# Altium PCB MAINSSMB V1.4 .PcbDoc (part 1 of 2)
Units mm, origin at the board's own origin, x right, y up, seen from the top; angles counter-clockwise.
Board outline 44.25 x 69.93 mm, 2 copper layers (Top Layer, Bottom Layer), stack 1.671 mm thick; 41 components, 30 nets, 189 pads, 20 vias.
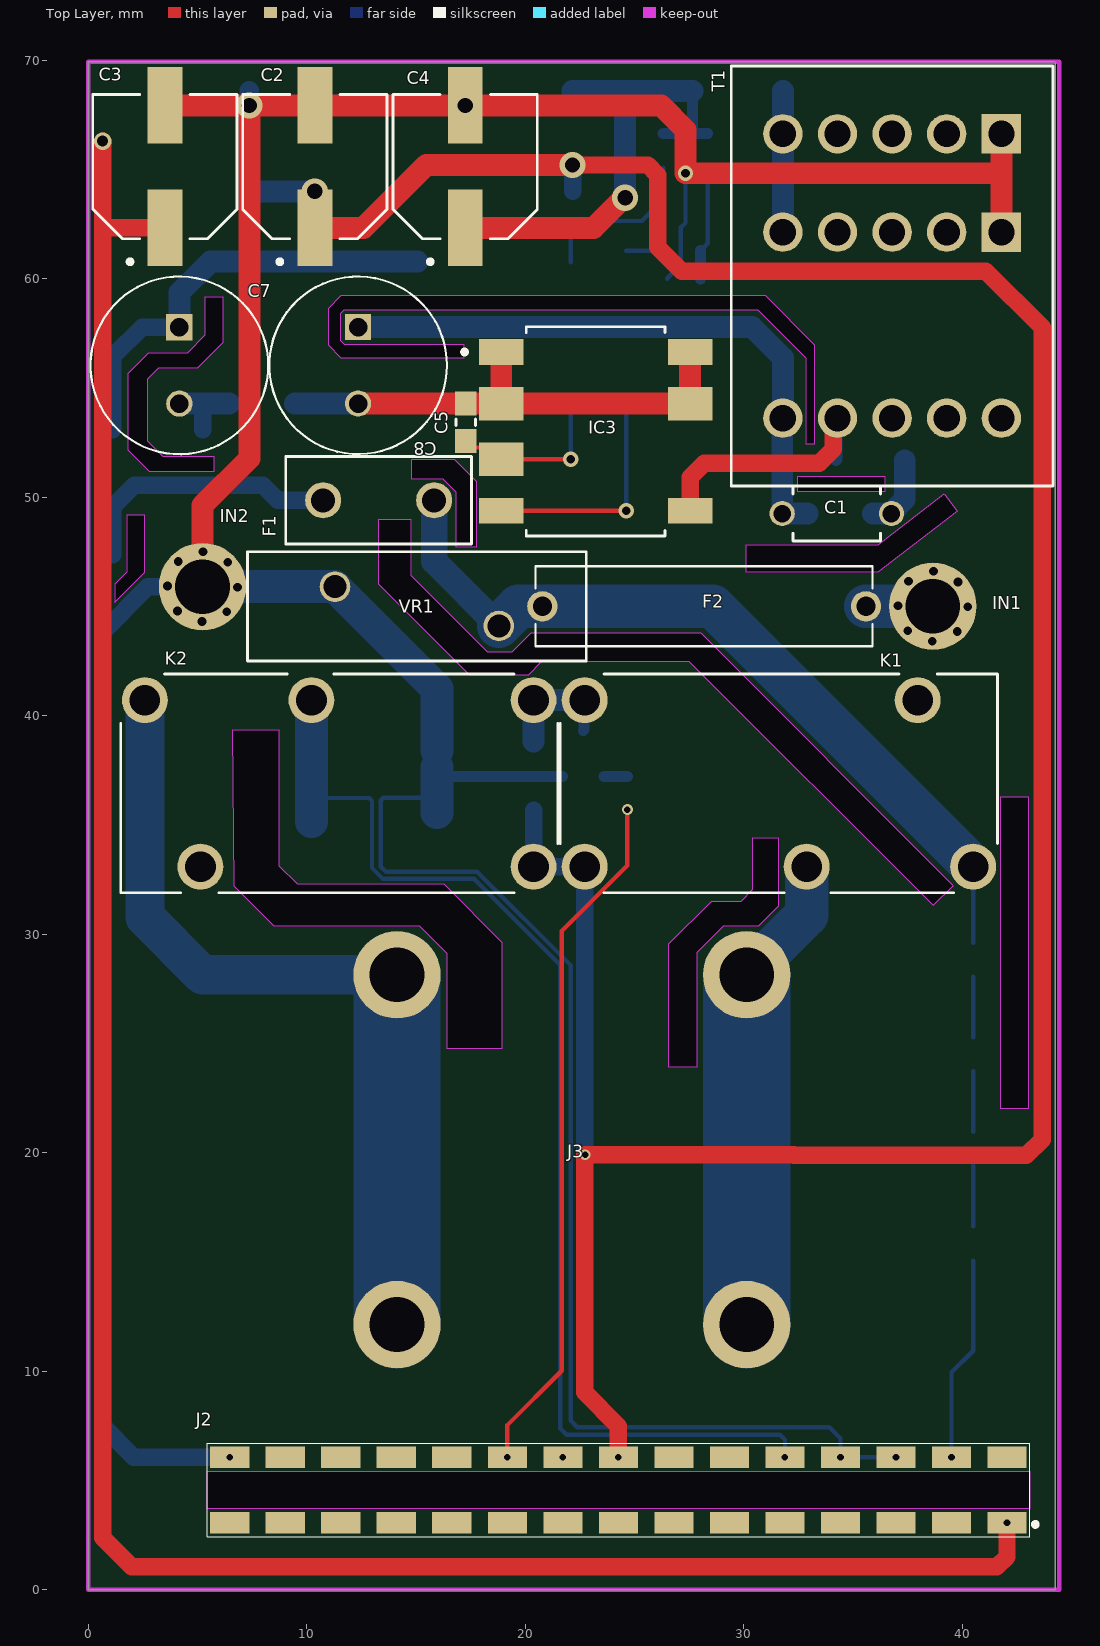
[diagram p0: Top Layer view]
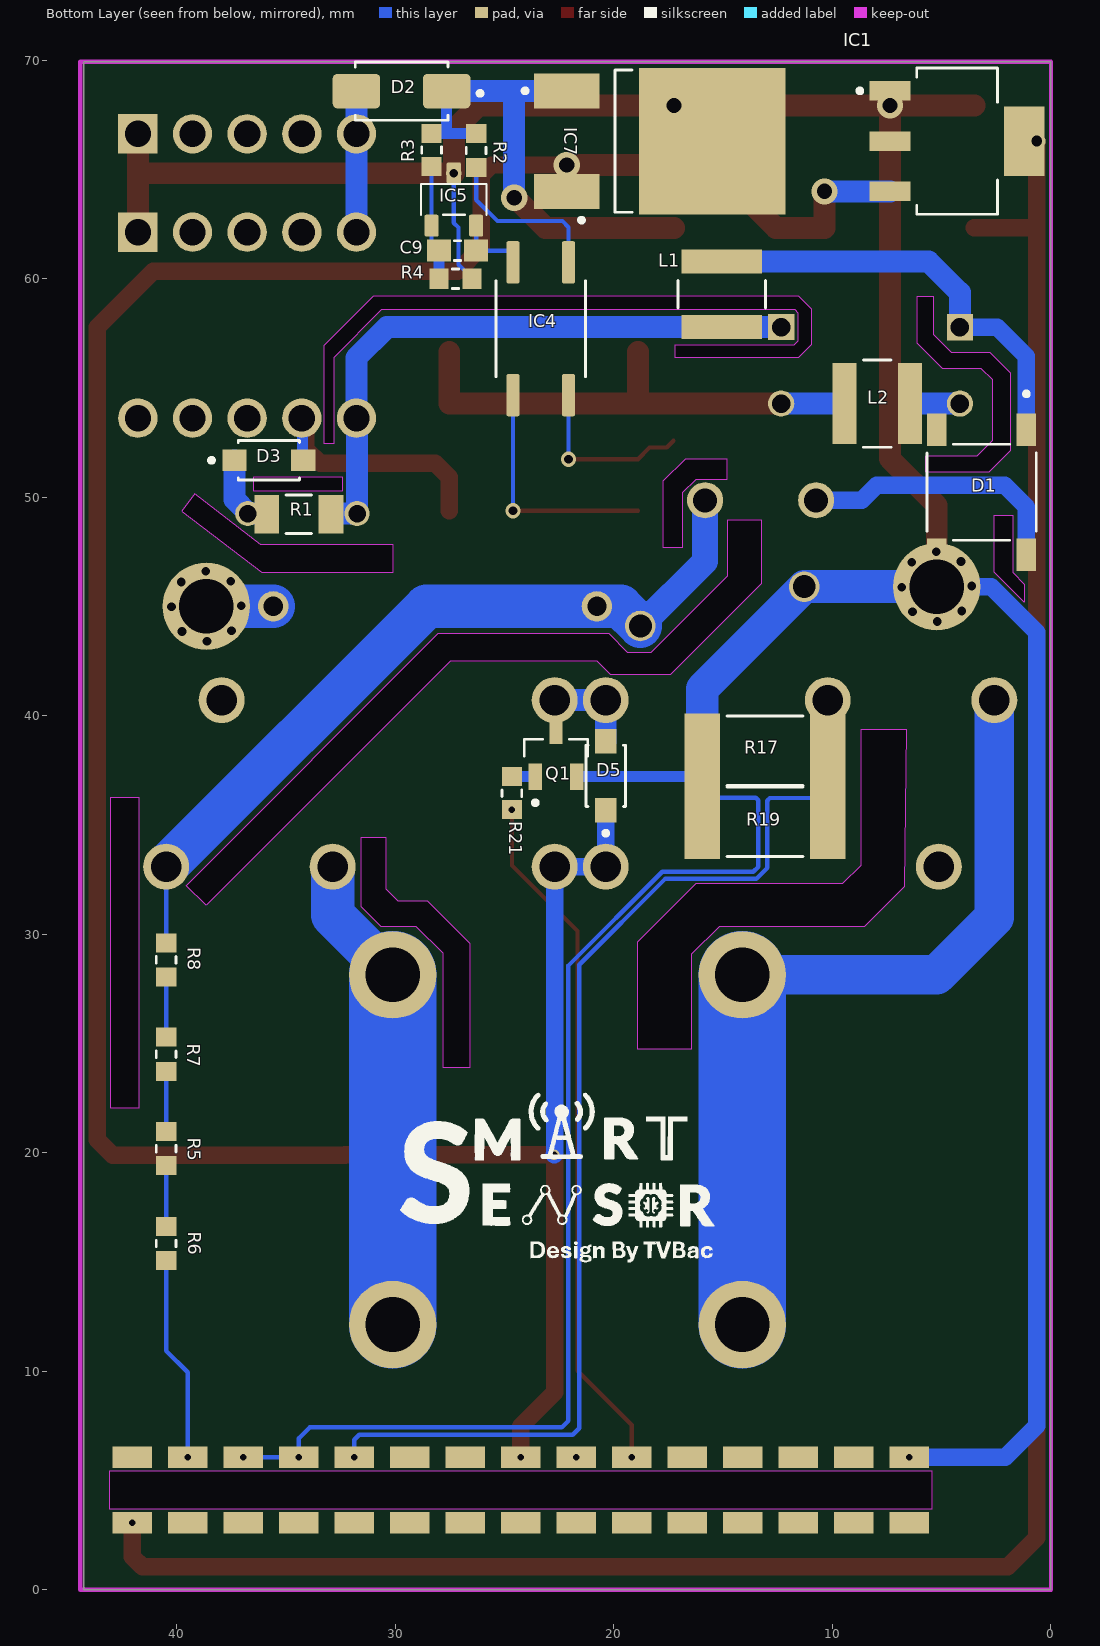
[diagram p1: Bottom Layer view, seen from below]

## Layer stack, top to bottom
Top Solder: solder mask 0.0102, Solder Resist, Dk 3.5
Top Layer: signal copper 0.0356
Dielectric 1: dielectric 1.6, FR-4, Dk 4.8
Bottom Layer: signal copper 0.0356
Bottom Solder: solder mask 0.0102, Solder Resist, Dk 3.5

## Board outline
0,0 0,69.926 44.247,69.926 44.247,0
cut-out: 1.219,45.204 2.588,46.572 2.588,49.166 1.753,49.166 1.753,46.558 1.219,46.025
cut-out: 32.436,50.927 32.436,50.267 36.474,50.267 36.474,50.927
cut-out: 31.572,34.417 31.572,31.293 30.658,30.378 29.058,30.378 27.838,29.159 27.838,23.927 26.568,23.927 26.568,29.566 28.524,31.521 29.87,31.521 30.404,32.055 30.404,34.417
cut-out: 6.604,39.37 8.712,39.37 8.712,33.147 9.55,32.309 16.256,32.309 18.923,29.642 18.923,24.765 16.434,24.765 16.434,29.108 15.164,30.378 8.509,30.378 6.688,32.199
cut-out: 17.755,47.701 16.84,47.701 16.84,50.216 16.231,50.825 14.808,50.825 14.808,51.74 16.739,51.74 17.755,50.724
cut-out: 6.147,59.182 6.147,57.074 4.978,55.905 3.2,55.905 2.692,55.397 2.692,52.578 3.404,51.867 5.74,51.867 5.74,51.156 2.819,51.156 1.829,52.146 1.829,55.677 2.769,56.617 4.547,56.617 5.359,57.429 5.359,59.182
cut-out: 32.817,52.451 33.249,52.451 33.249,56.947 30.988,59.207 11.557,59.207 10.973,58.623 10.973,56.972 11.557,56.388 17.196,56.388 17.196,56.972 11.735,56.972 11.557,57.15 11.557,58.42 11.709,58.572 30.632,58.572 32.817,56.388
cut-out: 41.732,36.271 41.732,22.047 43.028,22.047 43.028,36.271
cut-out: 36.152,47.828 39.171,50.151 39.763,49.361 36.119,46.558 30.099,46.558 30.099,47.828
cut-out: 39.573,32.233 28.042,43.764 20.244,43.764 19.38,42.901 18.288,42.901 14.783,46.406 14.783,48.971 13.259,48.971 13.259,46.05 17.424,41.885 20.142,41.885 20.752,42.494 27.483,42.494 38.659,31.318

## Design rules (kind name [scope] priority, off if disabled: settings)
Clearance [All] p1: gap=0.127 ignorepadtopadclearanceinfootprint=FALSE
ComponentClearance [All] p1: gap=0.1 collisioncheckmode=3 verticalgap=0.1 showdistances=FALSE
DiffPairsRouting [All] p1: maxlimit=2 minlimit=0.1 mostfreqgap=0.2 toplayer_minwidth=0.2 toplayer_maxwidth=2 toplayer_prefwidth=0.2 bottomlayer_minwidth=0.2 bottomlayer_maxwidth=2 bottomlayer_prefwidth=0.2 maxuncoupledlength=12.7
Height [All] p1: minheight=0 maxheight=50 prefheight=12.7
HoleToHoleClearance [All] p1: gap=0 allowstackedmicrovias=TRUE
MinimumSolderMaskSliver [All] p1: minsoldermaskwidth=0
PlaneClearance [All] p1: clearance=0.1
PlaneConnect [All] p1: planeconnectstyle=Direct reliefexpansion=0.508 reliefentries=4 reliefconductorwidth=0.254 reliefairgap=0.254
PolygonConnect [All] p1: connectstyle=Direct reliefconductorwidth=0.254 reliefentries=4 polygonreliefangle="90 Angle" airgapwidth=0.254
RoutingCorners [All] p1: cornerstyle=45-Degree minsetback=1 maxsetback=1
RoutingVias [All] p1: holewidth=0.4 width=0 viastyle="Through Hole" minholewidth=0.4 minwidth=0.7 maxholewidth=0.7 maxwidth=1.2
SilkToSilkClearance [All] p1: silktosilkclearance=0
SilkToSolderMaskClearance [IsPad] p1: minsilkscreentomaskgap=0 clearancetoexposedcopper=TRUE
SolderMaskExpansion [All] p1: expansion=0 istentingtop=FALSE
Width [All] p1: maxlimit=5 minlimit=0.2 preferedwidth=0.2
20 further rules are at their usual default settings.

## Components (designator, comment, footprint, x,y, rotation, side; value= is the part's Value field where it differs from the comment)
C1 "1000 pF ±5% 50V Ceramic Capacitor C0G, NP0 Radial" TH-CAP-HxLxW-5.5x4.0x2.5-TDKC 34.25,49.251 r180 top value=1nF
C2 "220 µF 16 V Aluminum - Polymer Capacitors Radial, Can - SMD 22mOhm 1000 Hrs @ 125°C" SMD-DxLxW-6.3x6.6x6.6-PEC 10.363,65.126 r90 top value=220uF
C3 "220 µF 10 V Aluminum - Polymer Capacitors Radial, Can - SMD 20mOhm 2000 Hrs @ 105°C" SMD-DxLxW-6.3x6.6x6.6-PEC 3.505,65.126 r90 top value=220uF
C4 "220 µF 16 V Aluminum - Polymer Capacitors Radial, Can - SMD 22mOhm 1000 Hrs @ 125°C" SMD-DxLxW-6.3x6.6x6.6-PEC 17.247,65.126 r90 top value=220uF
C5 "0.1 µF ±5% 50V Ceramic Capacitor X7R 0603 (1608 Metric)" SMD-CAP-0603-YAGEO 17.272,53.432 r90 top value=0.1uF
C7 "2.2 µF 400 V Aluminum Electrolytic Capacitors Radial, Can 2000 Hrs @ 85°C" TH-CAP-HxD-12.5x8.0-PEC 4.166,56.032 r270 top value=2.2uF
C8 "2.2 µF 400 V Aluminum Electrolytic Capacitors Radial, Can 2000 Hrs @ 85°C" TH-CAP-HxD-12.5x8.0-PEC 12.344,56.035 r270 top value=2.2uF
C9 "10000 pF ±5% 25V Ceramic Capacitor X7R 0603 (1608 Metric)" SMD-CAP-0603-YAGEO 27.153,61.282 r0 bottom value=0.01uF
D1 "Bridge Rectifier Single Phase Standard 1 kV Surface Mount ABS" DIODE-SMD-4-TSC 3.175,50.229 r270 bottom
D2 "Diode 40 V 3A Surface Mount DO-214AC (SMA)" SMD-DO-214AC-214-CT 29.714,68.58 r0 bottom
D3 "Diode 1000 V 1A Surface Mount SOD-123FL" SOD-123FL-SMCDS 35.789,51.689 r180 bottom value=6pF
D5 "Diode 1000 V 1A Surface Mount SOD-123FL" SOD-123FL-SMCDS 20.371,37.253 r90 bottom value=6pF
F1 "1 A 300 V AC DC Fuse Board Mount (Cartridge Style Excluded) Through Hole Radial, Box" FUSE-HxLxW-8.0x8.5x4.0-LI 13.284,49.86 r180 top value=1A
F2 "FUSE; 16A; 0031.8211_1" FUSE-3.6mmx10mm-AXIAL 28.181,45.009 r180 top value=16A
IC1 "Linear Voltage Regulator IC Positive Fixed 1 Output 1A SOT-223-3" SOT-223-3-DI 4.293,66.294 r180 bottom
IC3 "Converter Offline Flyback Topology 132kHz SMD-8B" SMD-8B-PI 23.216,53.012 r0 top
IC4 "Optoisolator Transistor Output 3750Vrms 1 Channel 4-SOP (2.54mm)" SOP-4 23.343,57.709 r270 bottom
IC5 "Shunt Voltage Reference IC Adjustable 2.495V 36 VV ±1% 100 mA SOT-23-3" SOT-23-3-DS 27.323,63.627 r90 bottom
IC7 "Linear Voltage Regulator IC Positive Fixed 1 Output 1A TO-252" TO252-3-RS 17.907,66.294 r180 bottom
IN1 "INPUT" INPUT-2.0x3.5 38.644,45.009 r0 top
IN2 "INPUT" INPUT-2.0x3.5 5.225,45.909 r0 top
J2 "30 Position Elevated Socket Connector 0.100\" (2.54mm) Through Hole Gold" HEADER-2.54-15x2-N3D 24.257,4.571 r180 top
J3 "Connector Header Through Hole 4 position 0.100\" (2.54mm)" SOCKET-SINGLE-WEV1081H 22.123,20.142 r0 top
K1 "JQ1P-5V-F" RELAY-JQ1P-10A-HxLxW-15.6x20.5x10.0-PEW 31.598,36.906 r0 top
K2 "JQ1P-5V-F" RELAY-JQ1P-10A-HxLxW-15.6x20.5x10.0-PEW 11.481,36.906 r180 top
L1 "220 µH Shielded Drum Core, Wirewound Inductor 250 mA 3.84Ohm Max Nonstandard" SMD-HxLxW-1.8x4.0x4.0-ALLC 15.062,59.282 r270 bottom value=220uH
L2 "220 µH Shielded Drum Core, Wirewound Inductor 250 mA 3.84Ohm Max Nonstandard" SMD-HxLxW-1.8x4.0x4.0-ALLC 7.95,54.282 r0 bottom value=220uH
Q1 "Bipolar (BJT) Transistor NPN 45 V 500 mA 100MHz 300 mW Surface Mount SOT-23-3 (TO-236)" SOT-23-3-ONSEMI 22.647,38.271 r90 bottom
R1 "300 kOhms ±1% 0.5W, 1/2W Chip Resistor 1206 (3216 Metric) Automotive AEC-Q200, Pulse Withstanding Thick Film" SMD-RES-1206-RS 34.417,49.225 r180 bottom value=300kR
R2 "100 Ohms ±1% 0.1W, 1/10W Chip Resistor 0603 (1608 Metric) Automotive AEC-Q200, High Voltage Thick Film" SMD-RES-0603-RS 26.303,65.863 r90 bottom value=100R
R3 "10 kOhms ±1% 0.25W, 1/4W Chip Resistor 0603 (1608 Metric) Automotive AEC-Q200, Pulse Withstanding Thick Film" SMD-RES-0603-SEI 28.343,65.888 r90 bottom value=10k
R4 "10 kOhms ±1% 0.25W, 1/4W Chip Resistor 0603 (1608 Metric) Automotive AEC-Q200, Pulse Withstanding Thick Film" SMD-RES-0603-SEI 27.248,59.995 r0 bottom value=10k
R5 "300 kOhms ±1% 0.1W, 1/10W Chip Resistor 0603 (1608 Metric) Automotive AEC-Q200, High Voltage Thick Film" SMD-RES-0603-RS 40.488,20.193 r270 bottom value=300kR
R6 "300 kOhms ±1% 0.1W, 1/10W Chip Resistor 0603 (1608 Metric) Automotive AEC-Q200, High Voltage Thick Film" SMD-RES-0603-RS 40.488,15.85 r270 bottom value=300kR
R7 "300 kOhms ±1% 0.1W, 1/10W Chip Resistor 0603 (1608 Metric) Automotive AEC-Q200, High Voltage Thick Film" SMD-RES-0603-RS 40.488,24.511 r90 bottom value=300kR
R8 "300 kOhms ±1% 0.1W, 1/10W Chip Resistor 0603 (1608 Metric) Automotive AEC-Q200, High Voltage Thick Film" SMD-RES-0603-RS 40.488,28.829 r270 bottom value=300kR
R17 "10 mOhms ±1% 3W Chip Resistor 2512 (6432 Metric) Automotive AEC-Q200, Current Sense, Moisture Resistant Metal Film" SMD-RES-2512-VD 13.084,38.405 r180 bottom value=10mR
R19 "10 mOhms ±1% 3W Chip Resistor 2512 (6432 Metric) Automotive AEC-Q200, Current Sense, Moisture Resistant Metal Film" SMD-RES-2512-VD 13.084,35.154 r180 bottom value=10mR
R21 "1 kOhms ±1% 0.25W, 1/4W Chip Resistor 0603 (1608 Metric) Automotive AEC-Q200, Pulse Withstanding Thick Film" SMD-RES-0603-SEI 24.663,36.456 r90 bottom value=1K
T1 "For SMPS Transformer 500VAC Isolation Through Hole" "EE13 - POWER" 36.779,60.123 r270 top
VR1 "VAR; B72214S0271K101" VARISTOR-TDK 15.037,45.009 r0 top

## Footprints (in the part's own frame and the unit in brackets; to place one, negate y for a bottom-side part, rotate by r counter-clockwise, add the part's x,y. Pads: shape width x height; smd on the part's side, far side on the other; paste and mask are expansions set on the pad)
DIODE-SMD-4-TSC [mm]
  rect 1.5x0.9 smd: AC1(2.86,2.05) AC2(2.86,-2.05) NEG(-2.86,-2.05) POS(-2.86,2.05)
  silkscreen extent -4.6,-2.5 2.2,2.5, body extent -3.22,-2.5 3.22,2.5, height 1.6
"EE13 - POWER" [mm]
  rect 1.8x1.8 / inner round 1.8 / far side rect 1.8x1.8 hole 1.2: 1(-6.505,5) 1(-2.005,5)
  round 1.8 hole 1.2: 2(-6.505,2.5) 2(-2.005,2.5) 3(-6.505,0) 3(-2.005,0) 4(-6.505,-2.5) 4(-2.005,-2.5) 5(-6.505,-5) 5(-2.005,-5) 6(6.505,-5) 7(6.505,-2.5) 8(6.505,0) 9(6.505,2.5) 10(6.505,5)
  silkscreen extent -9.6,-7.36 9.61,7.36, body extent -9.62,-7.37 9.62,7.37, height 15.24
FUSE-3.6mmx10mm-AXIAL [mm]
  round 1.388 hole 0.88: 1(-7.404,0) 2(7.404,0)
  silkscreen extent -7.7,-1.83 7.72,1.83, body extent -7.69,-1.81 7.72,1.81, height 3.61
FUSE-HxLxW-8.0x8.5x4.0-LI [mm]
  round 1.65 hole 1.1: 1(-2.54,0) 2(2.54,0)
  silkscreen extent -4.25,-2 4.25,2, body extent -4.19,-1.99 4.32,1.99, height 7.49
HEADER-2.54-15x2-N3D [mm]
  rect 1.8x1 smd: 01(-17.78,1.5) 02(-17.78,-1.5) 03(-15.24,1.5) 04(-15.24,-1.5) 05(-12.7,1.5) 06(-12.7,-1.5) 07(-10.16,1.5) 08(-10.16,-1.5) 09(-7.62,1.5) 10(-7.62,-1.5) 11(-5.08,1.5) 12(-5.08,-1.5) 13(-2.54,1.5) 14(-2.54,-1.5) 15(0,1.5) 16(0,-1.5) 17(2.54,1.5) 18(2.54,-1.5) 19(5.08,1.5) 20(5.08,-1.5) 21(7.62,1.5) 22(7.62,-1.5) 23(10.16,1.5) 24(10.16,-1.5) 25(12.7,1.5) 26(12.7,-1.5) 27(15.24,1.5) 28(15.24,-1.5) 29(17.78,1.5) 30(17.78,-1.5)
  rect 1.8x1 smd far side: 01(-17.78,1.5) 02(-17.78,-1.5) 03(-15.24,1.5) 04(-15.24,-1.5) 05(-12.7,1.5) 06(-12.7,-1.5) 07(-10.16,1.5) 08(-10.16,-1.5) 09(-7.62,1.5) 10(-7.62,-1.5) 11(-5.08,1.5) 12(-5.08,-1.5) 13(-2.54,1.5) 14(-2.54,-1.5) 15(0,1.5) 16(0,-1.5) 17(2.54,1.5) 18(2.54,-1.5) 19(5.08,1.5) 20(5.08,-1.5) 21(7.62,1.5) 22(7.62,-1.5) 23(10.16,1.5) 24(10.16,-1.5) 25(12.7,1.5) 26(12.7,-1.5) 27(15.24,1.5) 28(15.24,-1.5) 29(17.78,1.5) 30(17.78,-1.5)
  Keep-Out Layer board cut-out: -18.821,0.85 18.821,0.85 18.821,-0.85 -18.821,-0.85
  silkscreen extent -19.18,-2.13 18.82,2.13
INPUT-2.0x3.5 [mm]
  round 0.7 hole 0.4: 1(-1.6,0.025) 1(-1.149,-1.114) 1(-1.114,1.149) 1(-0.025,-1.6) 1(0.025,1.6) 1(1.114,-1.149) 1(1.149,1.114) 1(1.6,-0.025)
  round 4 hole 2.5: 1(0,0)
RELAY-JQ1P-10A-HxLxW-15.6x20.5x10.0-PEW [mm]
  round 2.1 hole 1.4: A1(-8.89,3.81) A2(-8.89,-3.81) COM(1.27,-3.81) NC(6.35,3.81) NO(8.89,-3.81)
  silkscreen extent -10,-5 10,5, body extent -10,-5 9.99,5, height 16
SMD-8B-PI [mil]
  rect 80x46 smd: 1(-170,143) 4(-170,-143) 5(170,-143) 8(170,143)
  rect 80x60 smd: 2(-170,50) 3(-170,-50) 7(170,50)
  silkscreen extent -240,-188 125,188, body extent -190,-188 190,188, height 157
SMD-CAP-0603-YAGEO [mm]
  rect 1.1x1 smd: 1(-0.85,0) 2(0.85,0)
  silkscreen extent -0.15,-0.45 0.15,0.45, body extent -0.8,-0.4 0.8,0.4, height 0.9
SMD-DO-214AC-214-CT [mm]
  rrect25% 2.17x1.57 smd: 1(-2.065,0) 2(2.065,0)
  silkscreen extent -3.69,-1.33 2.12,1.33, body extent -2.47,-1.25 2.47,1.25, height 2.2
SMD-DxLxW-6.3x6.6x6.6-PEC [mm]
  rect 3.5x1.6 smd: 1(-2.8,0) 2(2.8,0)
  silkscreen extent -4.45,-3.3 3.3,3.3, body extent -3.65,-3.3 3.65,3.3, height 5.9
SMD-HxLxW-1.8x4.0x4.0-ALLC [mm]
  rect 1.1x3.7 smd: 1(-1.5,0) 2(1.5,0)
  silkscreen extent -0.63,-2 0.63,2, body extent -2,-2 2,2, height 2.15
SMD-RES-0603-RS [mm]
  rect 0.87x0.93 smd: 1(-0.78,0) 2(0.78,0)
  silkscreen extent -0.15,-0.45 0.15,0.45, body extent -0.8,-0.4 0.8,0.4, height 0.55
SMD-RES-0603-SEI [mm]
  rect 0.87x0.93 smd: 1(-0.755,0) 2(0.755,0)
  silkscreen extent -0.15,-0.45 0.15,0.45, body extent -0.85,-0.47 0.85,0.47, height 0.56
SMD-RES-1206-RS [mm]
  rect 1.13x1.77 smd: 1(-1.47,0) 2(1.47,0)
  silkscreen extent -0.58,-0.88 0.58,0.88, body extent -1.6,-0.8 1.6,0.8, height 0.65
SMD-RES-2512-VD [mm]
  rect 1.62x3.4 smd: 1(-2.873,0) 2(2.873,0)
  silkscreen extent -1.74,-1.59 1.74,1.59, body extent -3.15,-1.58 3.15,1.58, height 0.7
SOCKET-SINGLE-WEV1081H [mm]
  round 4 hole 2.5: 1(-8,8) 2(8,8) 3(-8,-8) 4(8,-8)
  body extent -22,-11.35 22,11.35, height 32.1
SOD-123FL-SMCDS [mm]
  rect 1.12x0.99 smd: A(1.57,0) K(-1.57,0)
  silkscreen extent -2.72,-0.9 1.4,0.9, body extent -1.8,-0.9 1.8,0.9, height 1.1
SOP-4 [mm]
  rrect25% 1.93x0.59 smd: 1(-3.04,1.27) 2(-3.04,-1.27) 3(3.04,-1.27) 4(3.04,1.27)
  silkscreen extent -5.07,-2.05 2.2,2.05, body extent -3.5,-2.05 3.5,2.05, height 2
SOT-23-3-DS [mm]
  rrect25% 1x0.65 smd: 1(-1.2,1.02) 2(-1.2,-1.02) 3(1.2,0)
  silkscreen extent -0.7,-1.5 0.7,1.5, body extent -1.18,-1.46 1.18,1.46, height 1.12
SOT-23-3-ONSEMI [mm]
  rect 1.23x0.6 smd: 1(-1.06,0.95) 2(-1.06,-0.95) 3(1.06,0)
  silkscreen extent -2.35,-1.45 0.65,1.45, body extent -1.18,-1.46 1.18,1.46, height 1.11
SOT-223-3-DI [mm]
  rect 1.86x0.9 smd: 1(-3.075,2.3) 2(-3.075,0) 3(-3.075,-2.3)
  rect 1.86x3.19 smd: 4(3.075,0)
  silkscreen extent -4.55,-3.35 1.85,3.35, body extent -3.5,-3.25 3.5,3.25, height 1.65
TH-CAP-HxD-12.5x8.0-PEC [mm]
  rect 1.2x1.2 hole 0.85: 1(-1.75,0)
  round 1.2 hole 0.85: 2(1.75,0)
  silkscreen extent -4.06,-4.06 4.06,4.06, body extent -4,-4 4,4, height 11.5
TH-CAP-HxLxW-5.5x4.0x2.5-TDKC [mm]
  round 1.15 hole 0.8: 1(-2.5,0) 2(2.5,0)
  silkscreen extent -2,-1.25 2,1.25, body extent -2.75,-1.25 2.75,1.25, height 5.5
TO252-3-RS [mm]
  rect 3x1.6 smd: 1(-4.25,2.3) 3(-4.25,-2.3)
  rect 6.7x6.7 smd paste-2.645: 2(2.4,0)
  silkscreen extent -6.25,-3.25 -1.26,3.25, body extent -4.72,-3.25 5,3.25, height 2.4
VARISTOR-TDK [mm]
  round 1.4 hole 1.05: 1(-3.75,0.9) 2(3.75,-0.9)
  silkscreen extent -7.75,-2.5 7.75,2.5, body extent -7.75,-2.5 7.75,2.5, height 16.49

## Part data
C1: library part "CAP; TH; 0.001uF; 50V; FA28NP01H102JNU06", "Capacitor Ceramic 0.001uF 50V C0G 5% 5mm T/R", Case/Package=Radial, Manufacturer=TDK, Manufacturer Part Number=FA28NP01H102JNU06, Max Operating Temperature=150°C, Min Operating Temperature=-55°C, Ratings=AEC-Q200, Supplier Part Number=445-180768-1-ND, Tolerance=5%, Voltage Rating=50V, Category="Ceramic Capacitors", ComponentLink1Description=https://product.tdk.com/info/en/catalog/datasheets/leadmlcc_halogenfree_fa150_en.pdf?src-supplier=Digikey, ComponentLink1URL=https://product.tdk.com/info/en/catalog/datasheets/leadmlcc_halogenfree_fa150_en.pdf?src-supplier=Digikey, ComponentLink2Description=https://datasheet.octopart.com/FA28NP01H102JNU06-TDK-datasheet-155378142.pdf?src-supplier=TDK, ComponentLink2URL=https://datasheet.octopart.com/FA28NP01H102JNU06-TDK-datasheet-155378142.pdf?src-supplier=TDK, ComponentLink3Description=https://datasheet.octopart.com/FA28NP01H102JNU06-TDK-datasheet-154546129.pdf?src-supplier=Farnell, ComponentLink3URL=https://datasheet.octopart.com/FA28NP01H102JNU06-TDK-datasheet-154546129.pdf?src-supplier=Farnell, ComponentLink4Description="Link Digikey", ComponentLink4URL=https://www.digikey.com/en/products/detail/tdk-corporation/FA28NP01H102JNU06/5866347, Designer=TVBac, Features="High Temperature", Height - Seated (Max)=0.217inch, Lead Pitch=0.197inch, Lead/Base Style=Kinked, Length=0.157inch, Mounting Technology="Through Hole", Packaging="Tape and Reel", Pricing="1=0.37, 10=0.22, 50=0.1588, 100=0.1398, 500=0.1073, 1000=0.09719 (USD)", RoHS Compliant=Yes, Series=FA, Stock=2260, Supplier=Digikey, Width=0.098inch
C2 C4: library part "CAP; 220uF; 16V; SMD; 16SVPK220M", "Cap Aluminum Polymer 220uF 16VDC 20% (6.3 X 5.9mm) SMD 0.022 Ohm 1040mA 1000h 125C T/R", Case/Package=Radial, ESR (Equivalent Series Resistance)=22mR, Leakage Current=704uA, Manufacturer=Panasonic, Manufacturer Part Number=16SVPK220M, Max Operating Temperature=125°C, Min Operating Temperature=-55°C, Ripple Current=3.3A, Supplier Part Number=667-16SVPK220M, Tolerance=20%, Voltage Rating=16V, Category="Polymer Capacitors", ComponentLink1Description=https://industrial.panasonic.com/cdbs/www-data/pdf/AAB8000/AAB8000C226.pdf?src-supplier=Digikey, ComponentLink1URL=https://industrial.panasonic.com/cdbs/www-data/pdf/AAB8000/AAB8000C226.pdf?src-supplier=Digikey, ComponentLink2Description=https://datasheet.octopart.com/16SVPK220M-Panasonic-datasheet-136612383.pdf?src-supplier=Element14, ComponentLink2URL=https://datasheet.octopart.com/16SVPK220M-Panasonic-datasheet-136612383.pdf?src-supplier=Element14, ComponentLink3Description=https://datasheet.octopart.com/16SVPK220M-Panasonic-datasheet-142271499.pdf?src-supplier=Electro+Sonic, ComponentLink3URL=https://datasheet.octopart.com/16SVPK220M-Panasonic-datasheet-142271499.pdf?src-supplier=Electro+Sonic, ComponentLink4Description=https://datasheet.octopart.com/16SVPK220M-Panasonic-datasheet-151949914.pdf?src-supplier=TME, ComponentLink4URL=https://datasheet.octopart.com/16SVPK220M-Panasonic-datasheet-151949914.pdf?src-supplier=TME, ComponentLink5Description="Link Digikey", ComponentLink5URL=https://www.digikey.com/en/products/detail/panasonic-electronic-components/16SVPK220M/9765095, Designer=TVBac, Dissipation Factor=12%, Height=6mm, Material=Polymer, Mounting Technology="Surface Mount", Packaging="Cut Tape", Pricing="1=1.29, 10=0.794, 50=0.794, 100=0.723, 1000=0.489, 10000=0.45 (USD)", RoHS=Yes, Series="OS-CON™, SVPK", Stock=2355, Supplier=Mouser, Voltage Rating (DC)=16V
C3: library part "CAP; 220uF; 10V; SMD; 10SVPE220M", "Cap Aluminum Polymer 220uF 10VDC 20%( 6.3 X 5.9mm) SMD 0.02 Ohm 2700mA 2000h 105C T/R", Case/Package=Radial, ESR (Equivalent Series Resistance)=20mR, Leakage Current=500uA, Manufacturer=Panasonic, Manufacturer Part Number=10SVPE220M, Max Operating Temperature=105°C, Min Operating Temperature=-55°C, Package Quantity=1000, Ripple Current=2.7A, Supplier Part Number=667-10SVPE220M, Tolerance=20%, Voltage=10V, Category="Polymer Capacitors", ComponentLink1Description=https://datasheet.ciiva.com/25767/1734359-25767468.pdf?src-supplier=Farnell, ComponentLink1URL=https://datasheet.ciiva.com/25767/1734359-25767468.pdf?src-supplier=Farnell, ComponentLink2Description=https://datasheet.ciiva.com/22746/1734359-22746158.pdf?src-supplier=Element14, ComponentLink2URL=https://datasheet.ciiva.com/22746/1734359-22746158.pdf?src-supplier=Element14, ComponentLink3Description="Link Digikey", ComponentLink3URL=https://www.digikey.com/en/products/detail/panasonic-electronic-components/10SVPE220M/4204777, Construction=Cylindrical, Designer=TVBac, Diameter=6.3mm, Dissipation Factor=12%, Height=5.9mm, Lead Free="Lead Free", Length=5.9mm, Life (Hours)=2000Hour, Mounting Technology="Surface Mount", Packaging="Tape and Reel", Pins=6, Pricing="1=1.66, 10=1.53, 50=1.44, 100=1.19, 1000=0.857, 10000=0.768 (USD)", Reach SVHC Compliant=No, Ripple Current (AC)=2.7A, RoHS=Yes, RoHS Compliant=Yes, Series="OS-CON™, SVPE", Stock=1969, Supplier=Mouser, Termination=SMD/SMT, Voltage Rating=10V, Voltage Rating (DC)=10V
C5: library part "CAP; 0.1uF; 50V; 0603; SMD; CC0603JRX7R9BB104", "Multilayer Ceramic Capacitor, 0.1 uF, 50 V, ï¿½ 5%, X7R, 0603 [1608 Metric]", Manufacturer=Yageo, Manufacturer Part Number=CC0603JRX7R9BB104, Supplier Part Number=311-1779-1-ND, Category="Ceramic Capacitors", ComponentLink1Description=https://datasheet.ciiva.com/11465/upy-gphc-x7r-6-3v-to-50v-8-11465038.pdf?src-supplier=Avnet, ComponentLink1URL=https://datasheet.ciiva.com/11465/upy-gphc-x7r-6-3v-to-50v-8-11465038.pdf?src-supplier=Avnet, ComponentLink2Description="Link Digikey", ComponentLink2URL=https://www.digikey.com/en/products/detail/yageo/CC0603JRX7R9BB104/5195188, Designer=TVBac, Halogen Free=5694HalogenFree, Lead Free=5697LeadFree, Material=4241ConductorMaterial, Pins=2NUMBER, Pricing="1=0.1, 10=0.07, 50=0.04, 100=0.031, 500=0.02334, 1000=0.01833, 4000=0.01533, 8000=0.014, 12000=0.01333, 28000=0.01267, 100000=0.00917, 200000=0.00887, 400000=0.00833 (USD)", RoHS=Yes, Stock=376318, Supplier=Digikey
C7 C8: library part "CAP; TH; 2.2uF; 400V; ECA-2GM2R2", "Cap Aluminum Lytic 2.2uF 400V 20% (8 X 11.5mm) Radial 3.5mm 50mA 2000h 85C Automotive Bulk", Manufacturer=Panasonic, Manufacturer Part Number=ECA-2GM2R2, Supplier Part Number=667-ECA-2GM2R2, Category="Aluminum Electrolytic Capacitors", ComponentLink1Description=https://datasheet.ciiva.com/48522/radial-m-eng-tds-48522426.pdf?src-supplier=Distrelec, ComponentLink1URL=https://datasheet.ciiva.com/48522/radial-m-eng-tds-48522426.pdf?src-supplier=Distrelec, ComponentLink2Description="Link Digikey", ComponentLink2URL=https://www.digikey.com/en/products/detail/panasonic-electronic-components/ECA-2GM2R2/2688912, Designer=TVBac, Lead Free=5697LeadFree, Pins=2NUMBER, Pricing="1=0.45, 10=0.221, 50=0.221, 100=0.142, 1000=0.119, 10000=0.096 (USD)", RoHS=Yes, Stock=1247, Supplier=Mouser
C9: library part "CAP; 0.01uF; 25V; 0603; SMD; CC0603JRX7R8BB103", "Surface Mount Ceramic Multilayer Capacitor 0.01uF 5% X7R 25V 0603 Paper T/R", Manufacturer=Yageo, Manufacturer Part Number=CC0603JRX7R8BB103, Supplier Part Number=311-3995-1-ND, Category="Ceramic Capacitors", ComponentLink1Description=https://datasheet.ciiva.com/11465/upy-gphc-x7r-6-3v-to-50v-8-11465030.pdf?src-supplier=Avnet, ComponentLink1URL=https://datasheet.ciiva.com/11465/upy-gphc-x7r-6-3v-to-50v-8-11465030.pdf?src-supplier=Avnet, ComponentLink2Description="Link Digikey", ComponentLink2URL=https://www.digikey.com/en/products/detail/yageo/CC0603JRX7R8BB103/5883656, Designer=TVBac, Pricing="1=0.1, 10=0.061, 50=0.035, 100=0.0271, 500=0.02036, 1000=0.016 (USD)", RoHS=Yes, Stock=4379, Supplier=Digikey
D1: library part "DIODE; SMD; ABS10H", "Bridge Rectifiers 1A, 1000V, Standard Bridge Rectifier", Manufacturer="Taiwan Semiconductor", Manufacturer Part Number=ABS10H, Supplier Part Number=1801-ABS10HCT-ND, ComponentLink1Description="Link Digikey", ComponentLink1URL=https://www.digikey.com/en/products/detail/taiwan-semiconductor-corporation/ABS10H/7366098, Designer=TVBac, Pricing="1=0.49, 10=0.33, 100=0.2241, 500=0.17496, 1000=0.15869, 2000=0.14481 (USD)", Stock=4817, Supplier=Digikey
D2: library part "DIODE; SMD; SCHOTTKY; SS34-HF", "Diode Schottky Si 40V 3A 2-Pin SMA T/R", Manufacturer=Comchip, Manufacturer Part Number=SS34-HF, Supplier Part Number=641-2115-1-ND, Category=LDO, ComponentLink1Description=http://www.comchiptech.com/admin/files/product/20190514101641.pdf?src-supplier=Digikey, ComponentLink1URL=http://www.comchiptech.com/admin/files/product/20190514101641.pdf?src-supplier=Digikey, ComponentLink2Description="Link Digikey", ComponentLink2URL=https://www.digikey.com/en/products/detail/comchip-technology/SS34-HF/10279693, Designer=TVBac, Pricing="1=0.46, 10=0.325, 100=0.164, 500=0.14536, 1000=0.11312, 2000=0.10124 (USD)", RoHS=Yes, RoHS Compliant=Yes, Stock=65957, Supplier=Digikey
D3 D5: library part "DIODE; SMD; 1N4007FLN4007;", "Diode Gen Purp 1KV 1A SOD123FL", Forward Current=1A, Manufacturer="Sangdest Microelectronics", Manufacturer Part Number=1N4007FL, Max Forward Surge Current (Ifsm)=30A, Max Operating Temperature=150°C, Max Repetitive Reverse Voltage (Vrrm)=1kV, Max Reverse Current=5uA, Min Operating Temperature=-55°C, Supplier Part Number=1655-1N4007FLCT-ND, Category=Diodes, ComponentLink1Description="Link Digikey", ComponentLink1URL=https://www.digikey.com/en/products/detail/smc-diode-solutions/1N4007FL/11657817, Designer=TVBac, Height=1.1mm, Pricing="1=0.1, 10=0.058, 100=0.039, 500=0.02954, 1000=0.02627 (USD)", Reverse Voltage=1kV, RoHS=No, Stock=332632, Supplier=Digikey
F1: library part "FUSE; 1A; 36911000000", "Fuse Subminiature Slow Blow Acting 1A 300V Radial 8.5 X 4 X 8mm Ammo Pack", Case/Package=Radial, Current=1A, DC Cold Resistance=71.5mR, Manufacturer="Littelfuse Wickmann", Manufacturer Part Number=36911000000, Max Operating Temperature=85°C, Min Operating Temperature=-40°C, Package Quantity=1400, Supplier Part Number=F5459CT-ND, Voltage Rating (AC)=300V, Blow Characteristic="TIME DELAY", Category=Fuses, ComponentLink1Description=https://datasheet.ciiva.com/7464/littelfuse-fuse-369-series-7464654.pdf?src-supplier=Digikey, ComponentLink1URL=https://datasheet.ciiva.com/7464/littelfuse-fuse-369-series-7464654.pdf?src-supplier=Digikey, ComponentLink2Description=https://datasheet.ciiva.com/16320/littelfuse-fuse-369-16320426.pdf?src-supplier=Future+Electronics, ComponentLink2URL=https://datasheet.ciiva.com/16320/littelfuse-fuse-369-16320426.pdf?src-supplier=Future+Electronics, ComponentLink3Description="Link Digikey", ComponentLink3URL=https://www.digikey.com/en/products/detail/littelfuse-inc/36911000000/1986930, Current Rating=1A, Designer=TVBac, Fuse Current=1A, Fuse Type="Board Mount (Cartridge Style Excluded)", Height=0.315inch, Lead Free="Lead Free", Lead Length=18.8mm, Length=0.335inch, Mounting Technology="Through Hole", Packaging="Cut Tape", Pricing="1=0.58, 5=0.482, 10=0.446, 50=0.3714, 100=0.3433, 250=0.30924, 500=0.28568, 1400=0.25378, 2800=0.23421, 4200=0.22341, 7000=0.218 (USD)", Reach SVHC Compliant=No, RoHS=Yes, RoHS Compliant=Yes, Series="TE5® 369", Size=8mm, Stock=1380, Supplier=Digikey, Termination=Radial, Width=0.157inch, Working Voltage=300V
F2: Manufacturer=Schurter, Manufacturer Part Number=0031.8211, Supplier Part Number=486-1259-ND, Category="Fuse Holders", ComponentLink1Description=https://datasheet.ciiva.com/16215/93typ-ogn-16215101.pdf?src-supplier=Onlinecomponents.com, ComponentLink1URL=https://datasheet.ciiva.com/16215/93typ-ogn-16215101.pdf?src-supplier=Onlinecomponents.com, ComponentLink2Description=https://datasheet.ciiva.com/295/typ-ogn-295737.pdf?src-supplier=Digikey, ComponentLink2URL=https://datasheet.ciiva.com/295/typ-ogn-295737.pdf?src-supplier=Digikey, ComponentLink3Description=https://datasheet.ciiva.com/18416/70160102-18416645.pdf?src-supplier=Allied+Electronics, ComponentLink3URL=https://datasheet.ciiva.com/18416/70160102-18416645.pdf?src-supplier=Allied+Electronics, ComponentLink4Description=https://datasheet.ciiva.com/1269/1842496-1269252.pdf?src-supplier=Element14, ComponentLink4URL=https://datasheet.ciiva.com/1269/1842496-1269252.pdf?src-supplier=Element14, ComponentLink5Description=https://datasheet.ciiva.com/15188/getdatasheetpartid-392105-15188043.pdf?src-supplier=Verical, ComponentLink5URL=https://datasheet.ciiva.com/15188/getdatasheetpartid-392105-15188043.pdf?src-supplier=Verical, ComponentLink6Description=https://datasheet.ciiva.com/16385/typ-ogn-16385398.pdf?src-supplier=Future+Electronics, ComponentLink6URL=https://datasheet.ciiva.com/16385/typ-ogn-16385398.pdf?src-supplier=Future+Electronics, ComponentLink7Description=https://datasheet.ciiva.com/3014/typ-ogn-3014481.pdf?src-supplier=Avnet, ComponentLink7URL=https://datasheet.ciiva.com/3014/typ-ogn-3014481.pdf?src-supplier=Avnet, Designer=TVBac, Pricing="1=0.91, 50=0.676, 100=0.608, 500=0.47 (USD)", RoHS=Yes, Stock=46433, Supplier=Digikey
IC1: library part "LDO; 3V3; 1A; SMD; AZ1117EH-3.3TRG1", "Linear Voltage Regulator IC 1 Output 1A SOT-223", Package="SOT-223 Diodes Inc.", Availability=Unavailable, ComponentLink1Description="Link Digikey", ComponentLink1URL=https://www.digikey.com/en/products/detail/diodes-incorporated/AZ1117EH-3-3TRG1/5001329, Designer=TVBac, MF="Diodes Inc.", MP=AZ1117EH-3.3TRG1, Price=None, SnapEDA_Link=https://www.snapeda.com/parts/AZ1117EH-3.3TRG1/Diodes%20Inc./view-part/482930/?ref=snap
IC3: library part LNK364GN-TL, "AC to DC Switching Converter Off-Line Switcher 140kHz 7-Pin SMD-B / IC OFFLINE SWIT HV 8SMD", Manufacturer="Power Integrations", Supplier Part Number=596-1089-1-ND, Category="Voltage Regulators - Switching", ComponentLink1Description=https://datasheet.ciiva.com/1930/lnk362-364-1930587.pdf?src-supplier=Digikey, ComponentLink1URL=https://datasheet.ciiva.com/1930/lnk362-364-1930587.pdf?src-supplier=Digikey, ComponentLink2Description=https://datasheet.ciiva.com/1930/lnk362-364-1930588.pdf?src-supplier=Digikey, ComponentLink2URL=https://datasheet.ciiva.com/1930/lnk362-364-1930588.pdf?src-supplier=Digikey, ComponentLink3Description=https://datasheet.ciiva.com/1930/lnk362-364-1930589.pdf?src-supplier=Digikey, ComponentLink3URL=https://datasheet.ciiva.com/1930/lnk362-364-1930589.pdf?src-supplier=Digikey, ComponentLink4Description=https://datasheet.ciiva.com/12230/lnk362-364-3310-12230262.pdf?src-supplier=Mouser, ComponentLink4URL=https://datasheet.ciiva.com/12230/lnk362-364-3310-12230262.pdf?src-supplier=Mouser, ComponentLink5Description="Link Digikey", ComponentLink5URL=https://www.digikey.com/en/products/detail/power-integrations/LNK364GN-TL/1007182, Designer=TVBac, Manufacturer Part Number=LNK364GN-TL, Pricing="1=0.87, 100=0.7168 (USD)", RoHS=Yes, Stock=726, Supplier=Digikey
IC4: library part "ISO; 1CH; EL357N-G", "Transistor Output Optocoupler, 1-Element, 3750V Isolation", Manufacturer=Everlight, Manufacturer Part Number=EL357N-G, Supplier Part Number=1080-1037-ND, Category=Optocouplers, ComponentLink1Description=https://datasheet.ciiva.com/2086/201407061738295695-2086633.pdf?src-supplier=Digikey, ComponentLink1URL=https://datasheet.ciiva.com/2086/201407061738295695-2086633.pdf?src-supplier=Digikey, Pricing="1=0.7, 10=0.416, 100=0.2729, 500=0.2168, 1000=0.19958, 2000=0.18548, 5000=0.17066, 10000=0.16177, 25000=0.15242 (USD)", RoHS=Yes, Stock=137, Supplier=Digikey
IC5: library part "TL431AIDBZR; MIRROID;", "V-Ref Adjustable 2.495V to 36V 100mA Automotive 3-Pin SOT-23 T/R", Case/Package=SOT-23, Cathode Current=700uA, Manufacturer="Texas Instruments", Manufacturer Part Number=TL431AIDBZR, Max Operating Temperature=125°C, Max Output current=100mA, Max Output Voltage=36V, Max Supply Voltage=37V, Min Input Voltage=2.495V, Min Operating Temperature=-40°C, Package Quantity=1, Supplier Part Number=595-TL431AIDBZR, Temperature Coefficient=92ppm/°C, Tolerance=1%, Category="Voltage References", ComponentLink1Description=https://datasheet.ciiva.com/3235/tl432b-3235600.pdf?src-supplier=Avnet, ComponentLink1URL=https://datasheet.ciiva.com/3235/tl432b-3235600.pdf?src-supplier=Avnet, ComponentLink2Description=https://datasheet.ciiva.com/15148/getdatasheetpartid-171576-15148968.pdf?src-supplier=Verical, ComponentLink2URL=https://datasheet.ciiva.com/15148/getdatasheetpartid-171576-15148968.pdf?src-supplier=Verical, ComponentLink3Description=https://datasheet.ciiva.com/41462/001014548-da-01-en-ic-vref-shunt-prec-tl431aidbzr-sot-3-tid-41462400.pdf?src-supplier=Conrad, ComponentLink3URL=https://datasheet.ciiva.com/41462/001014548-da-01-en-ic-vref-shunt-prec-tl431aidbzr-sot-3-tid-41462400.pdf?src-supplier=Conrad, ComponentLink4Description=https://datasheet.ciiva.com/46397/1887475-46397705.pdf?src-supplier=Element14, ComponentLink4URL=https://datasheet.ciiva.com/46397/1887475-46397705.pdf?src-supplier=Element14, ComponentLink5Description=https://datasheet.ciiva.com/2006/tl431a-2006188.pdf?src-supplier=Digikey, ComponentLink5URL=https://datasheet.ciiva.com/2006/tl431a-2006188.pdf?src-supplier=Digikey, ComponentLink6Description=https://datasheet.ciiva.com/2006/tl431a-2006187.pdf?src-supplier=Digikey, ComponentLink6URL=https://datasheet.ciiva.com/2006/tl431a-2006187.pdf?src-supplier=Digikey, ComponentLink7Description=https://datasheet.ciiva.com/2006/tl431a-2006189.pdf?src-supplier=Digikey, ComponentLink7URL=https://datasheet.ciiva.com/2006/tl431a-2006189.pdf?src-supplier=Digikey, ComponentLink8Description="Link Digikey", ComponentLink8URL=https://www.digikey.com/en/products/detail/texas-instruments/TL431AIDBZR/686856, Designer=TVBac, Lead Free="Lead Free", Min Output Voltage=2.495V, Number of Channels=1, Output Current=100mA, Output Type=Adjustable, Output Voltage=36V, Packaging="Tape and Reel", Pins=3, Pricing="1=0.25, 10=0.142, 50=0.142, 100=0.101, 1000=0.095, 10000=0.08 (USD)", Radiation Hardening=No, Reach SVHC Compliant=No, Reference Type=Shunt,Adjustable, Reference Voltage=36V, RoHS=Yes, RoHS Compliant=Yes, Series=-, Stock=734349, Supplier=Mouser
IC7: library part "LDO; 5V; 1A; BA17805FP-E2", "Linear Voltage Regulator, Fixed, Positive Output, 7.5 V to 25 V, 5V, 1A, 3 Pins, TO-252 (DPAK)", Manufacturer=Rohm, Manufacturer Part Number=BA17805FP-E2, Supplier Part Number=755-BA17805FP-E2, Category="Voltage Regulators - Linear", ComponentLink1Description=https://datasheet.ciiva.com/23912/1747296-23912291.pdf?src-supplier=Newark, ComponentLink1URL=https://datasheet.ciiva.com/23912/1747296-23912291.pdf?src-supplier=Newark, ComponentLink2Description=https://datasheet.ciiva.com/26878/getdatasheetpartid-477305-26878653.pdf?src-supplier=Verical, ComponentLink2URL=https://datasheet.ciiva.com/26878/getdatasheetpartid-477305-26878653.pdf?src-supplier=Verical, ComponentLink3Description=https://datasheet.ciiva.com/22732/1747296-22732780.pdf?src-supplier=Element14, ComponentLink3URL=https://datasheet.ciiva.com/22732/1747296-22732780.pdf?src-supplier=Element14, ComponentLink4Description=https://datasheet.ciiva.com/6594/ba178-series-j-6594060.pdf?src-supplier=Digikey, ComponentLink4URL=https://datasheet.ciiva.com/6594/ba178-series-j-6594060.pdf?src-supplier=Digikey, ComponentLink5Description=https://datasheet.ciiva.com/6594/ba178-series-j-6594061.pdf?src-supplier=Digikey, ComponentLink5URL=https://datasheet.ciiva.com/6594/ba178-series-j-6594061.pdf?src-supplier=Digikey, ComponentLink6Description=https://datasheet.ciiva.com/6594/ba178-series-j-6594062.pdf?src-supplier=Digikey, ComponentLink6URL=https://datasheet.ciiva.com/6594/ba178-series-j-6594062.pdf?src-supplier=Digikey, ComponentLink7Description="Link Digikey", ComponentLink7URL=https://www.digikey.com/en/products/detail/rohm-semiconductor/BA17805FP-E2/658261, Designer=TVBac, Lead Free=5697LeadFree, Number of Channels=1NUMBER, Pricing="1=0.82, 10=0.599, 50=0.599, 100=0.411, 1000=0.336, 10000=0.251 (USD)", RoHS=Yes, Stock=4846, Supplier=Mouser, Watchdog Timer=5511WatchdogTimer
IN1 IN2: library part INPUT-2.0x3.5, Designer=TVBac
J2: library part "HEADER; 15x2PIN; 2.54; VER; ESQ-115-12-G-D; N3D", "Connector Receptacle 30 Position 0.100\" (2.54mm) Gold Through Hole", Color=Black, Manufacturer=Samtec, Manufacturer Part Number=ESQ-115-12-G-D, Package Quantity=1, Category=Connectors, ComponentLink1Description=https://datasheet.ciiva.com/755/esq-1xx-xx-x-x-xxx-xx-x-xx-mkt-755974.pdf?src-supplier=Digikey, ComponentLink1URL=https://datasheet.ciiva.com/755/esq-1xx-xx-x-x-xxx-xx-x-xx-mkt-755974.pdf?src-supplier=Digikey, ComponentLink2Description="Link Digikey", ComponentLink2URL=https://www.digikey.com/en/products/detail/samtec-inc/ESQ-115-12-G-D/2640973, Connector Type=Receptacle, Contact Material=Bronze, Contact Plating=Gold, Contact Type="Female Socket", Designer=TVBac, Gender=Receptacle, Mounting Technology="Through Hole", Number of Contacts=30, Number of Positions=30, Number of Rows=2, Packaging=Rail/Tube, Pitch=0.1inch, Pricing="1=6.2034, 10=5.5341, 30=5.50572, 50=5.47734, 100=4.4064 (USD)", Reach SVHC Compliant=No, RoHS=Yes, RoHS Compliant=Yes, Row Spacing=0.1inch, Series=ESQ, Stock=311, Supplier=Avnet, Supplier Part Number=ESQ-115-12-G-D, System=Connector, Termination=Solder
J3: library part "SOCKET; SINGLE;", "Conn Unshrouded Header HDR 4 POS 2.54mm Solder ST Thru-Hole Automotive Bulk", Manufacturer=Samtec, Manufacturer Part Number=TSW-104-14-L-S, Supplier Part Number=SAM1055-04-ND, Category=Connectors, ComponentLink1Description=https://datasheet.ciiva.com/25618/0900766b81154476-25618487.pdf?src-supplier=Rs, ComponentLink1URL=https://datasheet.ciiva.com/25618/0900766b81154476-25618487.pdf?src-supplier=Rs, ComponentLink2Description=https://datasheet.ciiva.com/10190/htsw-th-10190703.pdf?src-supplier=Avnet, ComponentLink2URL=https://datasheet.ciiva.com/10190/htsw-th-10190703.pdf?src-supplier=Avnet, ComponentLink3Description="Link Digikey", ComponentLink3URL=https://www.digikey.com/en/products/detail/samtec-inc/TSW-104-14-L-S/1102620, Designer=TVBac, Pricing="1=0.43, 10=0.377, 100=0.3107, 500=0.2702, 1000=0.22291, 5000=0.19589, 10000=0.18238 (USD)", RoHS=Yes, Stock=1246, Supplier=Digikey
K1 K2: library part "RELAY; SINGLE; 5VDC; CMP-05607-000163-1", "RELAY GEN PURPOSE SPDT 10A 5V", Coil Current=80mA, Coil Power=400mW, Coil Resistance=62.5R, Coil Voltage (DC)=5V, Contact Current Rating=10A, Max Operating Temperature=70°C, Max Voltage Rating (AC)=250V, Max Voltage Rating (DC)=110V, Min Operating Temperature=-40°C, Package Quantity=100, Coil Type=Non-Latching, ComponentLink1Description="Link Digikey", ComponentLink1URL=https://www.digikey.com/en/products/detail/panasonic-electric-works/JQ1P-5V-F/1242024?s=N4IgTCBcDaIFIEUCMAFAtAVgGpoGIgF0BfIA, Contact Material=Tin, Depth=10mm, Designer=TVBac, Height=15.6mm, Lead Free="Lead Free", Length=20mm, Mount="Through Hole", Number of Pins=5, Operate Time=20ms, Packaging=Bulk, Power Consumption=400mW, Power Rating=400mW, Relay Type="General Purpose", Release Time=10ms, RoHS Compliant=Yes, Series=JQ, Termination="PC Pin", Throw Configuration=SPDT, Voltage Rating (AC)=250V, Weight=7g, Width=20mm
L1 L2: library part "IND; 220uH; 250mA; ASPI-0418FS-221M-T3", "Power Inductor (SMD), 220 uH, ± 20%, 250 mA, Shielded, 330 mA, 4mm x 4mm x 1.8mm", Manufacturer=Abracon, Manufacturer Part Number=ASPI-0418FS-221M-T3, Supplier Part Number=815-ASPI0418FS221MT3, Category="Fixed Inductors", ComponentLink1Description=https://abracon.com/Magnetics/new/ASPI-0418FS.pdf?src-supplier=Digikey, ComponentLink1URL=https://abracon.com/Magnetics/new/ASPI-0418FS.pdf?src-supplier=Digikey, ComponentLink2Description="Link Digikey", ComponentLink2URL=https://www.digikey.com/en/products/detail/abracon-llc/ASPI-0418FS-221M-T3/10273501, Designer=TVBac, Pricing="1=0.36, 10=0.234, 50=0.234, 100=0.182, 1000=0.163, 10000=0.127 (USD)", RoHS=No, Stock=2874, Supplier=Mouser
Q1: library part "TRAN; NPN; 500mA;V;  BC817-25LT1G", "Single Bipolar Transistor, NPN, 45 V, 500 mA, 225 mW, SOT-23 (TO-236), 3 Pins, Surface Mount", Case/Package=SOT-23-3, Clock Frequency=100MHz, Collector Base Voltage (VCBO)=50V, Collector Emitter Breakdown Voltage=45V, Collector Emitter Saturation Voltage=700mV, Current Rating=500mA, Emitter Base Voltage (VEBO)=5V, Manufacturer="ON Semiconductor", Manufacturer Part Number=BC817-25LT1G, Max Operating Temperature=150°C, Max Power Dissipation=300mW, Min Operating Temperature=-55°C, Package Quantity=3000, Supplier Part Number=8062284, Category=BJTs, Collector Emitter Voltage (VCEO)=45V, Collector-emitter Voltage-Max=700mV, ComponentLink1Description=https://datasheet.ciiva.com/27748/2010413-27748829.pdf?src-supplier=Jameco, ComponentLink1URL=https://datasheet.ciiva.com/27748/2010413-27748829.pdf?src-supplier=Jameco, ComponentLink2Description=https://datasheet.ciiva.com/1196/bc817-16lt1-d-1196558.pdf?src-supplier=Element14, ComponentLink2URL=https://datasheet.ciiva.com/1196/bc817-16lt1-d-1196558.pdf?src-supplier=Element14, ComponentLink3Description=https://datasheet.ciiva.com/22641/bc817-16lt1-d-22641013.pdf?src-supplier=Farnell, ComponentLink3URL=https://datasheet.ciiva.com/22641/bc817-16lt1-d-22641013.pdf?src-supplier=Farnell, ComponentLink4Description=https://datasheet.ciiva.com/22664/bc817-16lt1-d-22664204.pdf?src-supplier=Element14, ComponentLink4URL=https://datasheet.ciiva.com/22664/bc817-16lt1-d-22664204.pdf?src-supplier=Element14, ComponentLink5Description=https://datasheet.ciiva.com/22664/1842041-22664101.pdf?src-supplier=Element14, ComponentLink5URL=https://datasheet.ciiva.com/22664/1842041-22664101.pdf?src-supplier=Element14, ComponentLink6Description="Link Digikey", ComponentLink6URL=https://www.digikey.com/en/products/detail/onsemi/BC817-25LT1G/918339, Contact Plating=Tin,Matte, Designer=TVBac, Frequency=100MHz, Gain Bandwidth Product=100MHz, Height=0.94mm, hFE Min=160, Lead Free="Lead Free", Length=2.9mm, Max Breakdown Voltage=45V, Max Collector Current=500mA, Number of Elements=1, Packaging="Tape and Reel", Pins=3, Polarity=NPN, Power Dissipation=300mW, Pricing="3000=0.0157, 12000=0.0151, 30000=0.0146, 75000=0.0142, 120000=0.0136 (USD)", Radiation Hardening=No, Reach SVHC Compliant=No, RoHS=Yes, RoHS Compliant=Yes, Series=-, Stock=1185000, Supplier="Future Electronics", Transition Frequency=100MHz, Width=1.3mm
R1: library part "RES; 300K; 1206; ESR18EZPF3003", "Res Thick Film 1206 300K Ohm 1% 0.5W(1/2W) ±100ppm/C Epoxy Resin Pad SMD Automotive T/R", Case Code (Imperial)=1206, Case Code (Metric)=3216, Manufacturer=Rohm, Manufacturer Part Number=ESR18EZPF3003, Max Operating Temperature=155°C, Max Power Dissipation=500mW, Min Operating Temperature=-55°C, Ratings=AEC-Q200, Supplier Part Number=755-ESR18EZPF3003, Temperature Coefficient=100ppm/°C, Tolerance=1%, Voltage Rating=200V, Case/Package=1206, Category="Chip SMD Resistors", ComponentLink1Description=https://datasheet.ciiva.com/2527/esr-2527195.pdf?src-supplier=Digikey, ComponentLink1URL=https://datasheet.ciiva.com/2527/esr-2527195.pdf?src-supplier=Digikey, ComponentLink2Description=https://datasheet.ciiva.com/2527/esr-2527196.pdf?src-supplier=Digikey, ComponentLink2URL=https://datasheet.ciiva.com/2527/esr-2527196.pdf?src-supplier=Digikey, ComponentLink3Description=https://datasheet.ciiva.com/2527/esr-2527197.pdf?src-supplier=Digikey, ComponentLink3URL=https://datasheet.ciiva.com/2527/esr-2527197.pdf?src-supplier=Digikey, ComponentLink4Description="Link Digikey", ComponentLink4URL=https://www.digikey.com/en/products/detail/rohm-semiconductor/ESR18EZPF3003/1983605, Designer=TVBac, Features="Automotive AEC-Q200", Number of Terminations=2, Packaging="Cut Tape", Pricing="1=0.12, 10=0.042, 50=0.042, 100=0.026, 1000=0.023, 10000=0.016 (USD)", RoHS=Yes, RoHS Compliant=Yes, Series=ESR, Stock=34367, Supplier=Mouser
R2: library part "RES; 100R; 0603; SMD; KTR03EZPF1000", "Res Thick Film 0603 100 Ohm 1% 0.1W(1/10W) ±100ppm/C Pad SMD T/R Automotive AEC-Q200", Case Code (Imperial)=0603, Case Code (Metric)=1608, Manufacturer=Rohm, Manufacturer Part Number=KTR03EZPF1000, Max Operating Temperature=155°C, Max Power Dissipation=100mW, Min Operating Temperature=-55°C, Ratings=AEC-Q200, Supplier Part Number=755-KTR03EZPF1000, Temperature Coefficient=100ppm/°C, Tolerance=1%, Voltage Rating=350V, Case/Package=0603, Category="Chip SMD Resistors", ComponentLink1Description=https://datasheet.ciiva.com/14926/ktr-14926472.pdf?src-supplier=Digikey, ComponentLink1URL=https://datasheet.ciiva.com/14926/ktr-14926472.pdf?src-supplier=Digikey, ComponentLink2Description=https://datasheet.ciiva.com/14932/ktr-14932133.pdf?src-supplier=Digikey, ComponentLink2URL=https://datasheet.ciiva.com/14932/ktr-14932133.pdf?src-supplier=Digikey, ComponentLink3Description="Link Digikey", ComponentLink3URL=https://www.digikey.com/en/products/detail/rohm-semiconductor/KTR03EZPF1000/4051558, Designer=TVBac, Features="Automotive AEC-Q200", Number of Terminations=2, Packaging="Cut Tape", Pricing="1=0.12, 10=0.039, 50=0.039, 100=0.024, 1000=0.021, 10000=0.015 (USD)", RoHS=Yes, RoHS Compliant=Yes, Series=KTR, Stock=66325, Supplier=Mouser, Voltage Rating (DC)=350V
R3 R4: library part "RES; 10K; 0603; SMD; ESR03EZPF1002", "SMD Chip Resistor, 10 kOhm, ± 1%, 250 mW, 0603 [1608 Metric], Thick Film, Anti-Surge", Case Code (Imperial)=0603, Case Code (Metric)=1608, Manufacturer=Rohm, Manufacturer Part Number=ESR03EZPF1002, Max Operating Temperature=155°C, Max Power Dissipation=250mW, Min Operating Temperature=-55°C, Package Quantity=1, Ratings=AEC-Q200, Supplier Part Number=RHM10KADCT-ND, Temperature Coefficient=100ppm/°C, Tolerance=1%, Voltage Rating (DC)=150V, Case/Package=0603, Category="Chip SMD Resistors", ComponentLink1Description=https://datasheet.ciiva.com/2469/esr-2469710.pdf?src-supplier=Digikey, ComponentLink1URL=https://datasheet.ciiva.com/2469/esr-2469710.pdf?src-supplier=Digikey, ComponentLink2Description=https://datasheet.ciiva.com/2469/esr-2469711.pdf?src-supplier=Digikey, ComponentLink2URL=https://datasheet.ciiva.com/2469/esr-2469711.pdf?src-supplier=Digikey, ComponentLink3Description=https://datasheet.ciiva.com/2469/esr-2469709.pdf?src-supplier=Digikey, ComponentLink3URL=https://datasheet.ciiva.com/2469/esr-2469709.pdf?src-supplier=Digikey, ComponentLink4Description="Link Digikey", ComponentLink4URL=https://www.digikey.com/en/products/detail/rohm-semiconductor/ESR03EZPF1002/1983429, Designer=TVBac, Features="Automotive AEC-Q200", Height=0.022inch, Lead Free=5697LeadFree, Length=0.063inch, Number of Terminations=2, Packaging="Cut Tape", Power Rating=250mW, Pricing="1=0.16, 10=0.078, 50=0.0516, 100=0.044, 500=0.03138, 1000=0.02764 (USD)", RoHS=Yes, RoHS Compliant=Yes, Series=ESR, Stock=2136779, Supplier=Digikey, Width=0.031inch
R5 R6 R7 R8: library part "RES; 300K; 0603; SMD; KTR03EZPF3003", "Res High Voltage Thick Film 0603 300k Ohm 1% 1/10W ±100ppm/°C Molded Paper T/R", Case Code (Imperial)=0603, Case Code (Metric)=1608, Manufacturer=Rohm, Manufacturer Part Number=KTR03EZPF3003, Max Operating Temperature=155°C, Max Power Dissipation=100mW, Min Operating Temperature=-55°C, Package Quantity=5000, Supplier Part Number=755-KTR03EZPF3003, Temperature Coefficient=100ppm/°C, Tolerance=1%, Voltage Rating=350V, Case/Package=0603, Category="Chip SMD Resistors", ComponentLink1Description=https://datasheet.ciiva.com/14926/ktr-14926439.pdf?src-supplier=Digikey, ComponentLink1URL=https://datasheet.ciiva.com/14926/ktr-14926439.pdf?src-supplier=Digikey, ComponentLink2Description=https://datasheet.ciiva.com/14925/ktr-14925709.pdf?src-supplier=Digikey, ComponentLink2URL=https://datasheet.ciiva.com/14925/ktr-14925709.pdf?src-supplier=Digikey, ComponentLink3Description="Link Digikey", ComponentLink3URL=https://www.digikey.com/en/products/detail/rohm-semiconductor/KTR03EZPF3003/4051625, Designer=TVBac, Features="Automotive AEC-Q200", Height=0.022inch, Length=0.063inch, Number of Terminations=2, Packaging="Cut Tape", Pricing="1=0.17, 10=0.055, 50=0.055, 100=0.032, 1000=0.026, 10000=0.019 (USD)", RoHS=Yes, RoHS Compliant=Yes, Series=KTR, Stock=9502, Supplier=Mouser, Voltage Rating (DC)=350V, Width=0.031inch
R17 R19: library part "RES; SHUNT; 10mOhm; SMD; WFMA2512R0100FEA", "Res Current Sense Metal Plate 2512 0.01 Ohm 1% 3W ±110ppm/°C Molded T/R", Manufacturer=Vishay, Manufacturer Part Number=WFMA2512R0100FEA, Power Rating=3W, Supplier Part Number=541-10292-6-ND, Temperature Coefficient=110ppm/°C, Category="Chip SMD Resistors", ComponentLink1Description=http://www.vishay.com/docs/30387/wfm.pdf?src-supplier=Digikey, ComponentLink1URL=http://www.vishay.com/docs/30387/wfm.pdf?src-supplier=Digikey, ComponentLink2Description=http://www.farnell.com/datasheets/2793367.pdf?src-supplier=Newark, ComponentLink2URL=http://www.farnell.com/datasheets/2793367.pdf?src-supplier=Newark, ComponentLink3Description="Link Digikey", ComponentLink3URL=https://www.digikey.com/en/products/detail/vishay-dale/WFMA2512R0100FEA/9992531, ComponentLink4Description="Link CXT", ComponentLink4URL=https://linhkien.cxt.vn/3121-wfma2512r0100fea-tro-001-ohms-1-3w.html, Designer=TVBac, Pricing="1=2.85, 10=1.682, 25=1.3844, 50=1.2026, 100=1.0506, 250=0.88712, 500=0.78654, 1000=0.70625 (USD)", RoHS=Yes, Supplier=Digikey
R21: library part "RES; 1K; 0603; SMD; ESR03EZPF1001", "SMD Chip Resistor, 1 kOhm, ± 1%, 250 mW, 0603 [1608 Metric], Thick Film, Anti-Surge", Manufacturer=Rohm, Manufacturer Part Number=ESR03EZPF1001, Supplier Part Number=RHM1.00KADCT-ND, Voltage Rating=150V, Category="Chip SMD Resistors", ComponentLink1Description=https://datasheet.ciiva.com/2469/esr-2469712.pdf?src-supplier=Digikey, ComponentLink1URL=https://datasheet.ciiva.com/2469/esr-2469712.pdf?src-supplier=Digikey, ComponentLink2Description=https://datasheet.ciiva.com/2469/esr-2469713.pdf?src-supplier=Digikey, ComponentLink2URL=https://datasheet.ciiva.com/2469/esr-2469713.pdf?src-supplier=Digikey, ComponentLink3Description=https://datasheet.ciiva.com/2469/esr-2469714.pdf?src-supplier=Digikey, ComponentLink3URL=https://datasheet.ciiva.com/2469/esr-2469714.pdf?src-supplier=Digikey, ComponentLink4Description="Link Digikey", ComponentLink4URL=https://www.digikey.com/en/products/detail/rohm-semiconductor/ESR03EZPF1001/1983428, Designer=TVBac, Lead Free=5697LeadFree, Pricing="1=0.11, 10=0.055, 50=0.0364, 100=0.0309, 500=0.02206, 1000=0.01943 (USD)", RoHS=Yes, Stock=2703233, Supplier=Digikey, Voltage Rating (DC)=150V
T1: library part EE13/6/6-Power, "OFFLINE TRANSFORMER 6W EE13/7/6", Package=Package, Check_prices=https://www.snapeda.com/parts/EE13/6/6/Wurth+Electronics/view-part/?ref=eda, MF="Wurth Electronics Inc", MP=EE13/6/6, SnapEDA_Link=https://www.snapeda.com/parts/EE13/6/6/Wurth+Electronics/view-part/?ref=snap